# Altium PCB sineytin.PCBDOC
Units mil, origin at the board's own origin, x right, y up, seen from the top; angles counter-clockwise.
Board outline 5995 x 3285 mil, 2 copper layers (TopLayer, BottomLayer); 24 components, 39 nets, 146 pads, 43 vias.
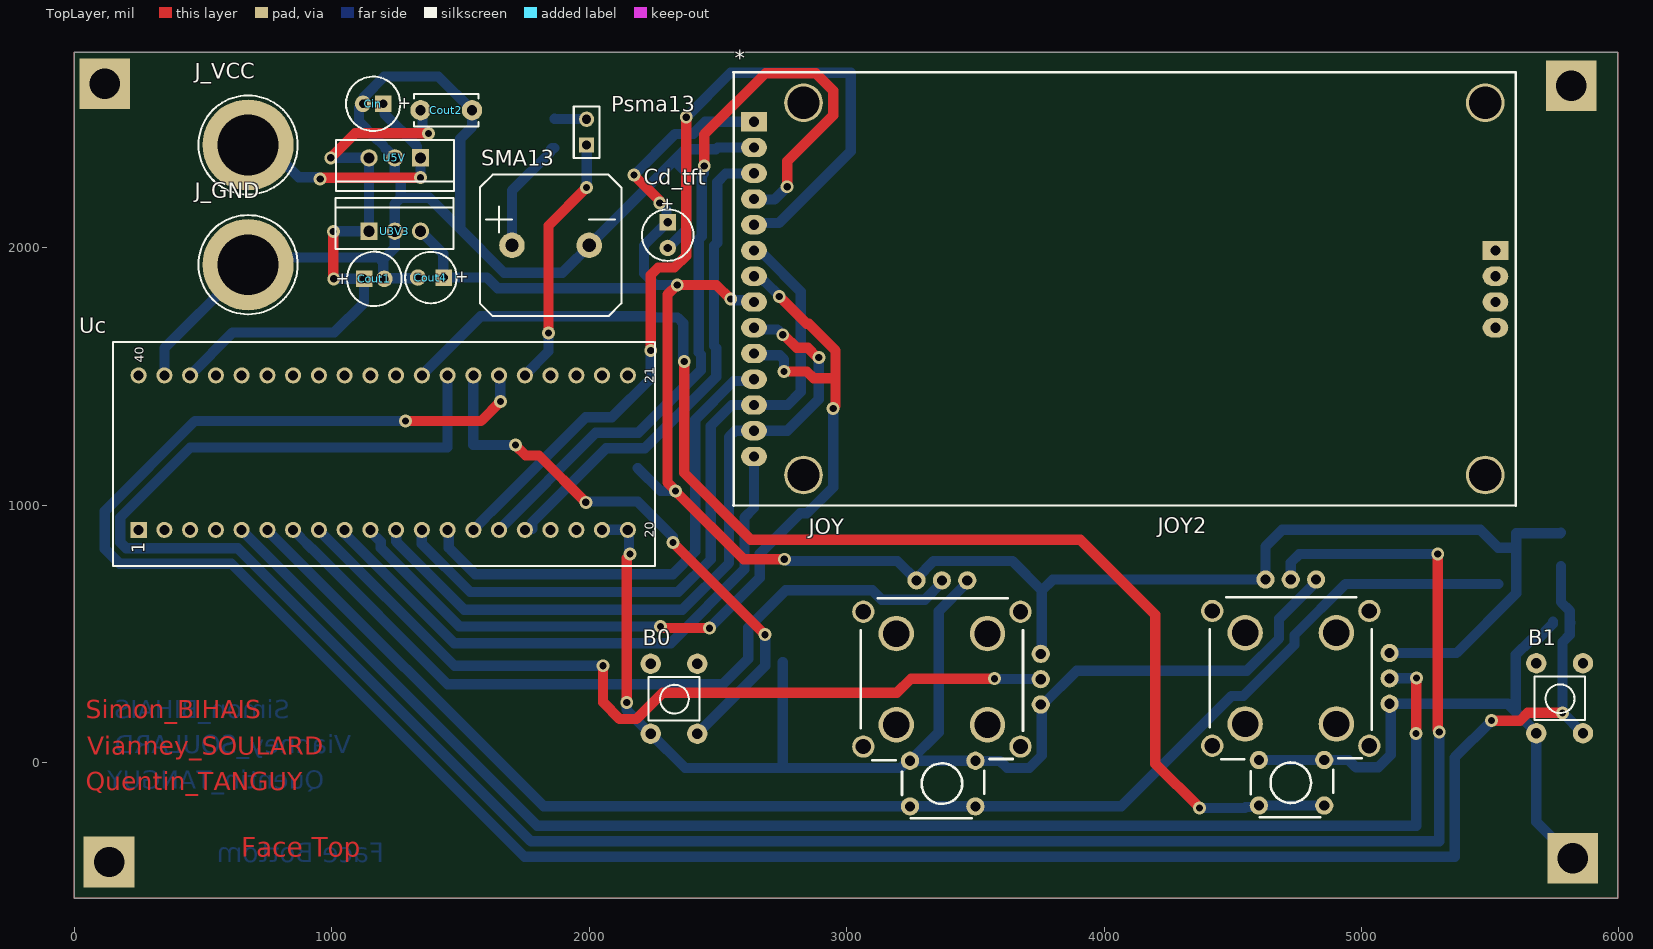
[diagram p0: TopLayer view]
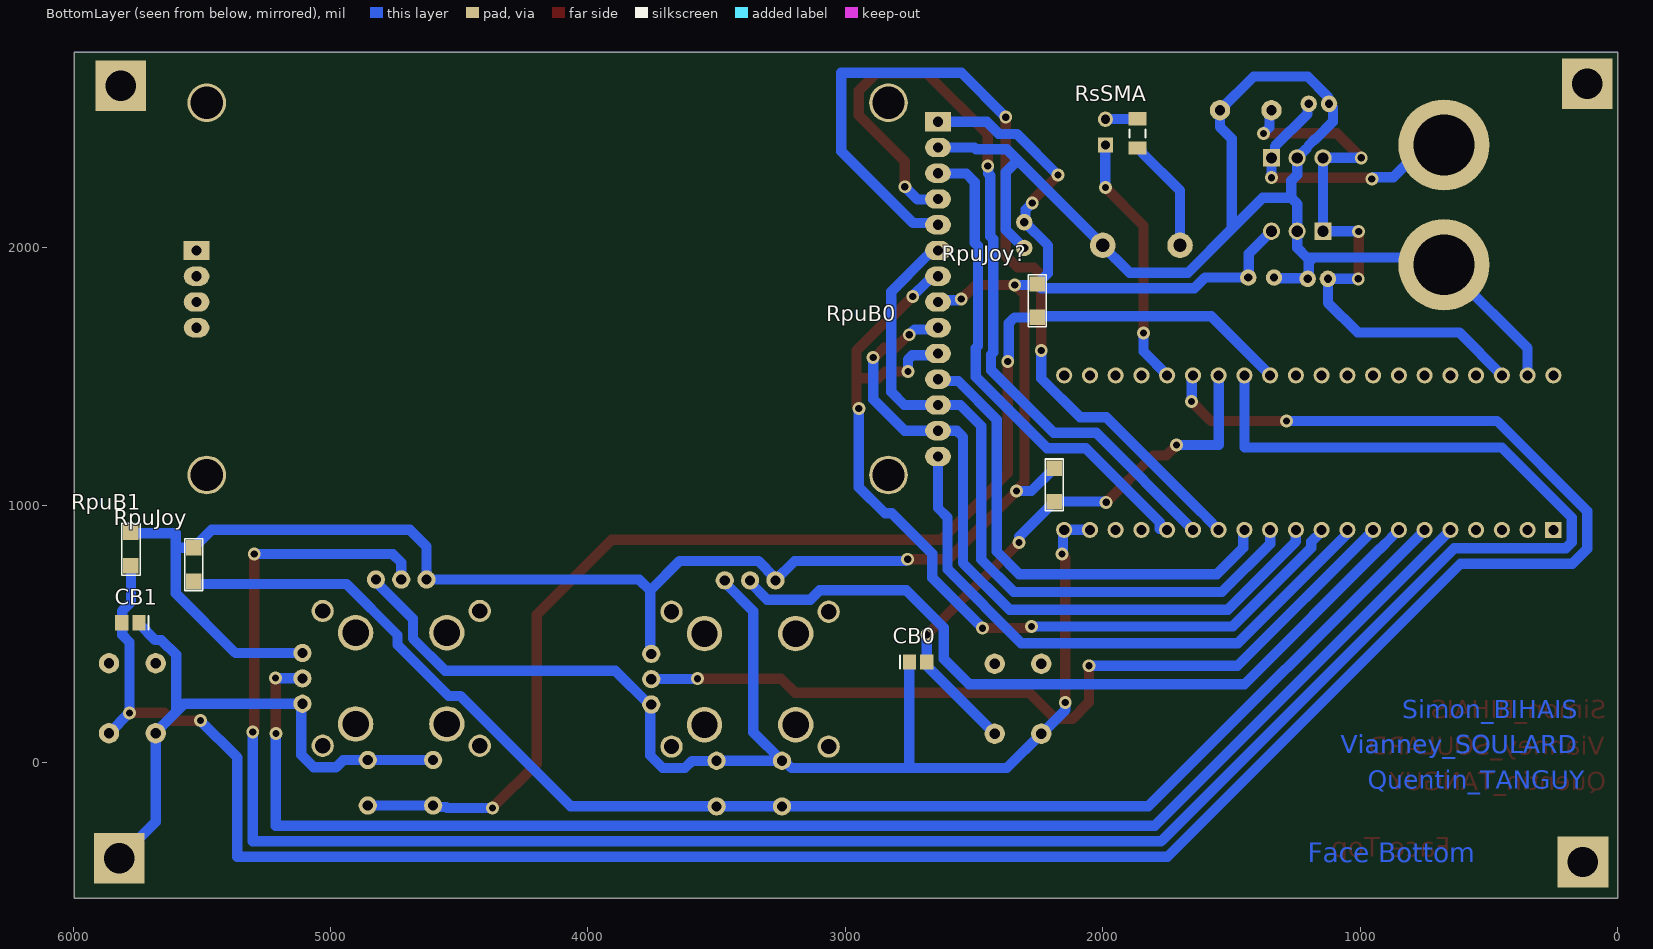
[diagram p1: BottomLayer view, seen from below]

## Layer stack, top to bottom
TopSolder: solder mask 0.4, Solder Resist, Dk 3.5
TopLayer: signal copper 1.4
Dielectric1: core 12.6, FR-4, Dk 4.8
BottomLayer: signal copper 1.4
BottomSolder: solder mask 0.4, Solder Resist, Dk 3.5

## Board outline
0,-525 0,2760 5995,2760 5995,-525

## Design rules (kind name [scope] priority, off if disabled: settings)
Clearance Clearance_3 [InNamedPolygon('Bot-GND') Or  InNamedPolygon('Top-GND')] p1: gap=10 ignorepadtopadclearanceinfootprint=FALSE except(0: Arc-Hole Track-Hole SMDPad-Hole THPad-Hole Via-Hole Fill-Hole Poly-Hole Region-Hole Text-Hole)
Clearance Clearance_2 [InNamedPolygon('Bot-GND') Or  InNamedPolygon('Top-GND')] p2: gap=40 ignorepadtopadclearanceinfootprint=FALSE
Clearance Clearance_1 [InNamedPolygon('Bot-GND') Or  InNamedPolygon('Top-GND')] p3: gap=10 ignorepadtopadclearanceinfootprint=FALSE except(0: Arc-Hole Track-Hole SMDPad-Hole THPad-Hole Via-Hole Fill-Hole Poly-Hole Region-Hole Text-Hole)
Clearance PowerPlaneClearance [InNamedPolygon('Bot-GND') Or  InNamedPolygon('Top-GND')] p4: gap=40 ignorepadtopadclearanceinfootprint=FALSE except(0: Arc-Hole Track-Hole SMDPad-Hole THPad-Hole Via-Hole Fill-Hole Poly-Hole Region-Hole Text-Hole)
Clearance [All] p5: gap=20 ignorepadtopadclearanceinfootprint=TRUE except(0: Arc-Hole Track-Hole SMDPad-Hole THPad-Hole Via-Hole Fill-Hole Poly-Hole Region-Hole Text-Hole)
FabricationTestPointUsage TestPointUsage [All] p1: valid=0 allowmultiple=FALSE
FabricationTestpoint Testpoint [All] p1: side=3 testpointundercomponent=TRUE minsize=40 maxsize=100 preferedsize=60 minholesize=20 maxholesize=40 preferedholesize=32 testpointgrid=1 allowsidetop=TRUE allowsidebottom=TRUE usegrid=TRUE gridtolerance=0.01
Height [All] p1: minheight=0 maxheight=2000 prefheight=500
HoleSize [All] p1: absolutevalues=TRUE maxlimit=300 minlimit=11.81 maxpercent=80.000 minpercent=20.000
PlaneClearance [All] p1: clearance=40
PlaneConnect [All] p1: planeconnectstyle=Relief reliefexpansion=19.68 reliefentries=4 reliefconductorwidth=40 reliefairgap=19.68
PolygonConnect [All] p1: connectstyle=Relief reliefconductorwidth=40 reliefentries=4 polygonreliefangle="90 Angle" airgapwidth=10
RoomDefinition projet_pcb_bluepill_f103 [InComponentClass('projet_pcb_bluepill_f103')] p1: confinementstyle=ConfineIn formatcopy=TRUE lockcomponents=FALSE outline 3080,-1830 5265,-1830 5265,-2490 3080,-2490
RoutingVias [All] p1: holewidth=23.62 width=60 viastyle="Through Hole" minholewidth=23.62 minwidth=60 maxholewidth=23.62 maxwidth=60
SilkToSolderMaskClearance SilkscreenOverComponentPads [IsPad] p1: minsilkscreentomaskgap=10 clearancetoexposedcopper=TRUE
SolderMaskExpansion [All] p1: expansion=2
Width [All] p1: maxlimit=1000 minlimit=12 preferedwidth=40
23 further rules are at their usual default settings.

## Classes and differential pairs
component class projet_pcb_bluepill_f103: B0 B1 CB0 CB1 Cd_tft Cin Cout1 Cout2 Cout4 J_GND J_VCC JOY2 Psma13 RpuB0 RpuB1 RpuJoy RpuJoy? RsSMA SMA13 U3V3 U5V

## Components (designator, comment, footprint, x,y, rotation, side; value= is the part's Value field where it differs from the comment)
* "2.4_TFT_TOUCH" 2.4_TFT_TOUCH 2560.16,1000 r0 top
B0 "BOUTON_POUSSOIR_MINIATURE_TRAVERSANT" BOUTON_POUSSE_PLAT_6x6 2231.02,97.6 r0 top
B1 "BOUTON_POUSSOIR_MINIATURE_TRAVERSANT" BOUTON_POUSSE_PLAT_6x6 5671.02,99.25 r0 top
CB0 "Condensateur 0805" C0805_N 2717.53,392 r180 bottom value=100nF
CB1 "Condensateur 0805" C0805_N 5777,544 r0 bottom value=100nF
Cd_tft "10uF" CONDENSATEUR_POLARISE_ELECTROLYTIQUE_RADIAL_2.54/5.08 2305,2100 r270 top
Cin "CONDENSATEUR_POL_ELECTROLY_RAD_2.0/5.08" CONDENSATEUR_POLARISE_ELECTROLYTIQUE_RADIAL_2.0/5.08 1160.63,2560 r180 top value=10µF/>25V
Cout1 "CONDENSATEUR_POL_ELECTROLY_RAD_2.0/5.08" CONDENSATEUR_POLARISE_ELECTROLYTIQUE_RADIAL_2.0/5.08 1165,1880 r0 top value=1µF/>10V
Cout2 "CONDENSATEUR_CER_RAD_5.08" CONDENSATEUR_CERAMIQUE_RADIAL_5.08 1545,2535 r180 top value=100nF
Cout4 "CONDENSATEUR_POL_ELECTROLY_RAD_2.54/5.08" CONDENSATEUR_POLARISE_ELECTROLYTIQUE_RADIAL_2.54/5.08 1435,1885 r180 top value=4.7µF/63V
J_GND "DOUILLE BANANE 4mm" DOUILLE_BANANE_4mm 675,1935 r0 top
J_VCC "DOUILLE BANANE 4mm" DOUILLE_BANANE_4mm 675,2400 r0 top
JOY "JOYSTICK_MINI_AVEC_SWITCH" "JOYSTICK_MINI - avec Switch" 3370,325 r0 top
JOY2 "JOYSTICK_MINI_AVEC_SWITCH" "JOYSTICK_MINI - avec Switch" 4725.12,328.19 r0 top
Psma13 "Jumper SIP 2.54" HDR1X2 1990,2400 r90 top
RpuB0 "RESISTANCE_CMS_1206" RESISTANCE_CMS_1206 2189,1014.99 r90 bottom value=10k
RpuB1 "RESISTANCE_CMS_1206" RESISTANCE_CMS_1206 5775,765 r90 bottom value=10k
RpuJoy "RESISTANCE_CMS_1206" RESISTANCE_CMS_1206 5531,705 r90 bottom value=10k
RpuJoy? "RESISTANCE_CMS_1206" RESISTANCE_CMS_1206 2255,1730 r90 bottom value=10k
RsSMA "220" R1206_N 1865,2445 r90 bottom
SMA13 "BUZZER_SMA13" BUZZER_SMA13 1700,2010 r0 top value=SMA13
U3V3 "REGULATEUR_TO220_78XX" REGULATEUR_TO220_78XX 1245,2065 r0 top
U5V "REGULATEUR_TO220_78XX" REGULATEUR_TO220_78XX 1245,2350 r180 top
Uc "STM32F103C8T6/PCB_DIP40" STM32F103C8T6_DIP40 250,905 r90 top

## Footprints (in the part's own frame and the unit in brackets; to place one, negate y for a bottom-side part, rotate by r counter-clockwise, add the part's x,y. Pads: shape width x height; smd on the part's side, far side on the other; paste and mask are expansions set on the pad)
2.4_TFT_TOUCH [mil]
  round 150 hole 125: 0(272.44,118.11) 0(272.44,1563.78) 0(2920.47,118.11) 0(2920.47,1563.78)
  rect 100x75 hole 40: 1(80,1490) 18(2959.84,990)
  oval 100x75 hole 40: 2(80,1390) 3(80,1290) 4(80,1190) 5(80,1090) 6(80,990) 7(80,890) 8(80,790) 9(80,690) 10(80,590) 11(80,490) 12(80,390) 13(80,290) 14(80,190) 15(2959.84,690) 16(2959.84,790) 17(2959.84,890)
  silkscreen extent 0,-1 3039,1682, body extent 0,-1 3039,1681, height 650
BOUTON_POUSSE_PLAT_6x6 [mil] "BOUTON POUSSOIR MINIATURE ON/OFF; BOUTON PLAT/LONG ; ESPACEMENT BROCHES = 7.62mm/5.08mm"
  round 79 hole 40: 1(7.87,15.75) 2(188.98,15.75) 3(188.98,287.4) 4(7.87,287.4)
  silkscreen extent 0,67 197,236, body extent -22,-1 222,310, height 276
BUZZER_SMA13 [mil] "BUZZER SMA13 ; DIMENSIONS :13.96mm x 13.96mm ; ESPACEMENT BROCHES : 7.62mm"
  round 99 hole 52: 1(0,0) 2(300,0)
  silkscreen extent -125,-275 425,275, body extent -126,-276 425,276, height 256
C0805_N [mm] "Chip Capacitor, Body 2.0x1.3mm, IPC Medium Density"
  rect 1.3x1.5 smd: 1(-0.85,0) 2(0.85,0)
  silkscreen extent -1.8,-0.65 -1.8,0.65, body extent -0.99,-0.63 1.01,0.62, height 0.8
CONDENSATEUR_CERAMIQUE_RADIAL_5.08 [mil] "CONDENSATEUR TRAVERSANT CERAMIQUE RADIAL ; DIMENSIONS : 3.17mm x 5.08mm"
  round 79 hole 40: 1(0,0) 2(200,0)
  silkscreen extent -25,-62 225,63, body extent -11,-43 209,42, height 148
CONDENSATEUR_POLARISE_ELECTROLYTIQUE_RADIAL_2.0/5.08 [mil] "CONDENSATEUR POLARISE ELECTROLYTIQUE RADIAL ; DIAMETRE : 5.08mm ; ESPACEMENT BROCHES : 2mm"
  rect 64x64 / inner round 64 / far side round 64 hole 32: 1(-39.37,0)
  round 64 hole 32: 2(39.37,0)
  silkscreen extent -106,-106 105,106, body extent -98,-98 98,98, height 433
CONDENSATEUR_POLARISE_ELECTROLYTIQUE_RADIAL_2.54/5.08 [mil] "CONDENSATEUR_POLARISE_ELECTROLYTIQUE_RADIAL ; DIAMETRE : 5.08mm ; ESPACEMENT BROCHES : 2.54mm"
  rect 64x64 / inner round 64 / far side round 64 hole 32: 1(0,0)
  round 64 hole 32: 2(100,0)
  silkscreen extent -50,-100 150,100, body extent -50,-101 149,98, height 446
DOUILLE_BANANE_4mm [mm] "DOUILLE BANANE ; DIAMETRE PASSAGE CONTACT = 4 mm ; DIAMETRE PERCAGE = 6 mm"
  round 9 hole 6: 1(0,0)
  silkscreen extent -4.89,-4.89 4.89,4.89, body extent -5.5,-5.6 5.63,5.53, height 4.79
HDR1X2 [mm] "Connector; Header; 2 Position"
  rect 1.5x1.5 hole 0.9: 1(0,0)
  round 1.5 hole 0.9: 2(2.54,0)
  silkscreen extent -1.27,-1.27 3.81,1.27
"JOYSTICK_MINI - avec Switch" [mm] "JOYSTICK POTENTIOMETRIQUE MINIATURE - RKJXK122000D - 22.7mmx20.7mm"
  round 1.8 hole 1: 1(-2.5,9.75) 2(0,9.75) 3(2.5,9.75) 4(9.75,2.5) 5(9.75,0) 6(9.75,-2.5) 7(-3.15,-8.05) 7(3.3,-8.05) 8(-3.15,-12.55) 8(3.3,-12.55)
  round 2.2 hole 1.5: -(-7.75,-6.65) -(-7.75,6.65) -(7.75,-6.65) -(7.75,6.65)
  round 3.5 hole 2.6: -(-4.5,-4.5) -(-4.5,4.5) -(4.5,-4.5) -(4.5,4.5)
  silkscreen extent -8,-13.72 8,8, body extent -13.39,-14.61 13.61,13.56, height 30.16
R1206_N [mm] "Chip Resistor, Body 3.2x1.6mm, IPC Medium Density"
  rect 1.3x1.8 smd: 1(-1.45,0) 2(1.45,0)
  silkscreen extent -0.4,-0.8 0.4,0.8, body extent -1.68,-0.87 1.68,0.87, height 0.71
REGULATEUR_TO220_78XX [mm] "BOITIER TO220 ; DIMENSIONS : 11.2mm x 4.7mm ; ESPACEMENT BROCHES : 2.54 mm"
  rect 1.7x1.7 hole 1.1: 1(-2.54,0)
  round 1.7 hole 1.1: 2(0,0) 3(2.54,0)
  silkscreen extent -5.83,-1.77 5.8,3.29, body extent -5.61,-1.59 5.61,3.1, height 19.33
RESISTANCE_CMS_1206 [mil] "RESISTANCE CMS 1206 ; DIMENSIONS : 3.2mm x 1.6mm"
  rect 60x60 smd: 1(0,0) 2(130,0)
  silkscreen extent -35,-35 165,35, body extent 0,-31 126,31, height 39
STM32F103C8T6_DIP40 [mm] "STM32F103 monté sur DIP40"
  rect 1.6x1.6 hole 1: 1(0,0)
  round 1.6 hole 1: 2(0,-2.54) 3(0,-5.08) 4(0,-7.62) 5(0,-10.16) 6(0,-12.7) 7(0,-15.24) 8(0,-17.78) 9(0,-20.32) 10(0,-22.86) 11(0,-25.4) 12(0,-27.94) 13(0,-30.48) 14(0,-33.02) 15(0,-35.56) 16(0,-38.1) 17(0,-40.64) 18(0,-43.18) 19(0,-45.72) 20(0,-48.26) 21(15.24,-48.26) 22(15.24,-45.72) 23(15.24,-43.18) 24(15.24,-40.64) 25(15.24,-38.1) 26(15.24,-35.56) 27(15.24,-33.02) 28(15.24,-30.48) 29(15.24,-27.94) 30(15.24,-25.4) 31(15.24,-22.86) 32(15.24,-20.32) 33(15.24,-17.78) 34(15.24,-15.24) 35(15.24,-12.7) 36(15.24,-10.16) 37(15.24,-7.62) 38(15.24,-5.08) 39(15.24,-2.54) 40(15.24,0)
  silkscreen extent -3.56,-50.92 18.54,2.54, body extent -3.63,-51.04 18.37,6.1, height 20.63

## Part data
B0 B1: "BOUTON POUSSOIR MINIATURE TRAVERSANT ON/OFF", Type=B_POUSS_MINI_T
CB0 CB1: library part CONDENSATEUR_CER_RAD_5.08, Type=RADIAL_5.08
Cd_tft: library part Condensateur, "Capacitor", LatestRevisionDate=17-Jul-2002, LatestRevisionNote="Re-released for DXP Platform.", PackageReference=RAD-0.3, Published=8-Jun-2000, Publisher="Altium Limited"
Cin Cout1: "CONDENSATEUR POLARISE ELECTROLYTIQUE RADIAL 2.0/5.08", Type=POL_RAD_2.0/5.08
Cout2: "CONDENSATEUR TRAVERSANT CERAMIQUE RADIAL 5.08mm", Type=RADIAL_5.08
Cout4: "CONDENSATEUR POLARISE ELECTROLYTIQUE RADIAL 2.54/5.08", Type=POL_RAD_2.54/5.08
J_GND J_VCC: library part DOUILLE_BANANE_4mm, "DOUILLE BANANE 4 mm", Type=BANANE_4mm
JOY JOY2: "JOYSTICK POTENTIOMETRIQUE MINIATURE RKJXK122000D", Type=JOYSTICK
Psma13: library part "Jumper SIP2.54", "Jumper SIP2.54"
RpuB0 RpuB1 RpuJoy RpuJoy?: "RESISTANCE CMS 1206", Type=CMS_1206
RsSMA: library part Resistor, "Resistor", LatestRevisionDate=17-Jul-2002, LatestRevisionNote="Re-released for DXP Platform.", PackageReference=AXIAL-0.5, Published=8-Jun-2000, Publisher="Altium Limited"
SMA13: "BUZZER SMA13", Type=BUZZER
U3V3 U5V: "REGULATEUR DE TENSION POSITIVE 78XX BOITIER TO220", Package=(TO220)
  U3V3: Type=LF33CV
  U5V: Type=7805
Uc: "MICROCONTROLEUR 32 BITS - 72MHz - 34 I/O - 64 KO : FLASH - 20KO RAM - 10 CANAUX A/D 12 BITS - DIP40 - UART, SPI, I2C, USB, CAN", Package=DIP40, Type=STM32F103C8T6

## Free pads (board coordinates)
  rect 196.85x196.85 hole 118.11: 1(118.11,2637.8) 2(135,-385) 3(5820,-370) 4(5815,2630)

## Via types
v1: diameter 50, hole 28, TopLayer to BottomLayer, 43 vias

## Nets (pads, with @x,y where several pads share a name; then routed paths per layer and width w, separated by ;. In a path a pad name is that pad's centre, name@x,y a point inside that pad or via, vN(x,y) a via of type N, cw(c..) or ccw(c..) an arc to the next point about the centre after c; other vN are vias at no path point)
+3V3: *.1 *.8 Cd_tft.1 Cout4.1 JOY2.1 JOY2.4 JOY.1 JOY.4 RpuB0.2 RpuB1.2 RpuJoy.2 RpuJoy?.2 U3V3.3 | length 8504.5
  TopLayer w40: v1(2174,2283) 2272.09,2184.91 2272.09,2176.91 v1(2274,2175) ; v1(2550,1802) 2548,1802 2494,1856 v1(2342,1856) 2304,1818 2304,1089.71 2335,1058.71 v1(2335,1056) 2600,791 v1(2758,791)
  BottomLayer w40: U3V3.3 1433,1977 1433,1887 Cout4.1 1603.22,1885 1644.22,1844 2239,1844 RpuJoy?.2 ; v1(2174,2283) 2334,2443 2403.92,2443 2450.92,2490 *.1 ; RpuB0.2 2277.99,1056 v1(2335,1056) ; v1(2274,2175) 2300.41,2148.59 2300.41,2104.59 Cd_tft.1 2303.18,2100 2213,2009.82 2213,1902 RpuJoy?.2 ; v1(2342,1856) 2259,1856 RpuJoy?.2 ; v1@2557,1802 2562.3,1796.7 2633.46,1796.7 *.8 ; v1(2758,791) 2765,784 3196.43,784 JOY.1 3271.57,717.11 3338.75,784.29 3643.71,784.29 3758.43,669.57 ; JOY.4 3758.43,427.99 3758.43,669.57 ; JOY2.4 5369.18,426.61 5601,658.43 5601,835 ; RpuB1.2 5771.57,891.57 5601,891.57 5601,835 ; 3758.43,669.57 3800.9,712.05 JOY2.1 4626.69,839.69 4692,905 5461,905 RpuJoy.2 5601,835
+3V3_BP: Uc.40
+3V3_BP2: Uc.18
+5V: Cout1.1 Cout2.2 U3V3.1 U5V.3 Uc.38 | length 2286.5
  TopLayer w40: v1(996,2350) 1091,2445 v1(1376,2445) ; v1(1006.09,2064) 1006.09,1881.91 v1(1008,1880)
  BottomLayer w40: Uc.38 450,1506.11 615.89,1672 1010,1672 1125.63,1787.63 Cout1.1 v1(1008,1880) v1@1007,1879 ; v1@995,2349 v1(996,2350) U5V.3 U3V3.1 1007.09,2065 v1(1006.09,2064) ; Cout2.2 1352.46,2527.54 1352.46,2468.54 v1(1376,2445)
GND: *.2 B0.1 B1.1 CB0.1 CB1.1 Cd_tft.2 Cin.2 Cout1.2 Cout2.1 Cout4.2 J_GND.1 JOY2.3 JOY2.6 JOY2.7 JOY.3 JOY.6 JOY.7 pad.3 pad.4 SMA13.2 U3V3.2 U5V.2 Uc.19 Uc.20 Uc.39 | length 12663.2
  TopLayer w40: v1(2146,235) 2146,795.29 2159,808.29 v1(2159,811)
  BottomLayer w40: Uc.39 350,1610 J_GND.1@629.04,1889.04 ; J_GND.1 703,1963 1199.78,1963 1208,1963 1245,2000 U3V3.2 1245,2171.1 1268.43,2194.53 ; 1194.47,1949.47 1199.78,1944.16 1199.78,1884.59 Cout1.2 1206.87,1882.5 1332.5,1882.5 Cout4.2 ; 1199.08,2399.82 1175.43,2423.46 1172,2423.46 1106,2489.46 1106,2544.74 Cin.2 1125.85,2564.59 1125.85,2587.68 1204.18,2666 1414,2666 Cout2.1 1545,2470 1499.04,2424.04 1499.04,2074.04 ; 1209.09,2385.91 U5V.2 1245,2289.41 ; 1245,2284.41 1268.43,2260.98 1268.43,2194.53 ; 1952,1959 1951,1958 1950,1958 1896,1904 1669.08,1904 1499.04,2074.04 ; 1955.05,1963.05 2000,2008 SMA13.2 2330.5,2340.5 ; Uc.19 Uc.20 2154.4,900.6 2154.4,818.31 2159,813.71 v1(2159,811) ; v1(2146,235) 2146,205.12 2237.78,113.35 B0.1 2372.36,-20.12 2749.88,-20.12 ; Cd_tft.2 2306.82,2000 2377,2070.18 2377,2294 2330.5,2340.5 ; *.2 2499.09,2390 2492.09,2383 2373,2383 2330.5,2340.5 ; CB0.1 2752,391 2752,-18 2749.88,-20.12 ; JOY.3 3468.43,700.61 3357.2,589.38 3357.2,119.29 JOY.7@3245.98,8.07 ; JOY2.7@4601.1,11.26 4855.04,11.26 4855.54,10.76 4950.47,10.76 4978.16,-16.93 5064.74,-16.93 5113.54,31.87 5113.54,225.2 JOY2.6 5568.24,229.76 5599.4,198.6 ; JOY2.3 4823.54,703.8 4679.65,559.9 4679.65,483.05 4554.37,357.76 3893.3,357.76 3762.11,226.57 JOY.6 3758.43,222.01 3758.43,28.68 3709.62,-20.12 3623.04,-20.12 3595.36,7.57 3500.42,7.57 3499.92,8.07 JOY.7@3245.98,8.07 ; CB1.1@5743.53,547.94 CB1.1 5743.53,540.06 5680.5,477.03 5656.84,477.03 5599.4,419.58 5599.4,198.6 ; pad.3@5774.04,-415.96 5774.04,-324.04 5678.9,-228.9 B1.1 5678.9,119.1 5599.4,198.6 ; 1268.43,2194.53 1378.55,2194.53 1499.04,2074.04 ; 2749.88,-20.12 3209.44,-20.12 3237.63,8.07 JOY.7@3245.98,8.07
"JOY2_y         PA0_AN0": JOY2.5 Uc.5 | length 5719.9
  TopLayer w40: v1(5212,114) 5213,115 5213,329 v1(5214,330)
  BottomLayer w40: Uc.5 650,903.89 1798.42,-244.53 5212,-244.53 v1(5212,114) ; JOY2.5 5212.19,328.19 v1(5214,330)
"JOY_b           PA1_AN1": JOY.8 RpuJoy.1 Uc.6 | length 5607
  BottomLayer w40: Uc.6 750,903.89 1822.98,-169.09 3245.98,-169.09 3499.92,-169.09 4066.71,-169.09 4495.73,259.92 4541.38,259.92 4739.65,458.2 4739.65,496.73 4937.93,695 RpuJoy.1@5531,695
"JOY_x        PA2_U2TX": JOY.2 Uc.7 | length 3042.1
  BottomLayer w40: Uc.7 878.5,876.5 878.5,875.39 920.39,833.5 921.5,833.5 1449.5,305.5 2519.5,305.5 2618,404 2618,524.92 2763.2,670.12 3099.39,670.12 3136.08,633.42 3302.82,633.42 3370,700.61 JOY.2
"JOY_y        PA3_U2TX": JOY.5 Uc.8 | length 3258
  TopLayer w40: v1(2054,377) 2054,235.08 2119.08,170 2183.12,170 2285.12,272 3195,272 3250,327 v1(3574,327)
  BottomLayer w40: Uc.8 950,903.89 1476.89,377 v1(2054,377) ; v1(3574,327) 3575,326 3752.86,326 JOY.5
NetPsma13_2: Psma13.2 RsSMA.2 | length 125.9
  BottomLayer w40: RsSMA.2 1866.04,2501.04 1988.96,2501.04 Psma13.2
NetRsSMA_1: RsSMA.1 SMA13.1 | length 452
  BottomLayer w40: SMA13.1 1700,2222.91 1849.57,2372.48 1849.57,2382.32 1855.16,2387.91 RsSMA.1
PA4_TOUCH-IRQ: *.14 Uc.9 | length 2317.3
  BottomLayer w40: Uc.9 1050,889.85 1475.35,464.5 2316.28,464.5 2603,751.22 2603,952.68 2640.16,989.84 *.14
PA5_TFT-SCK: *.7 *.10 Uc.10 | length 3611.5
  TopLayer w40: v1(2277,530) 2283.18,523.82 2466.18,523.82 v1(2466.85,523.15) ; v1(2738,1812) 2844.49,1705.51 2852.42,1705.51 2957,1600.92 2957,1493.35 ; v1(2757,1520.08) 2844.99,1520.08 2871.72,1493.35 2957,1493.35 ; v1(2947.6,1376.38) 2957,1385.78 2957,1493.35
  BottomLayer w40: Uc.10 1150,898.78 1190,858.78 1190,834.71 1494.71,530 v1(2277,530) ; v1(2466.85,523.15) 2663,719.29 2663,813 2819,969 2846.12,969 2947.6,1070.48 v1(2947.6,1376.38) ; *.10 2646.85,1583.3 2740.27,1583.3 2757,1566.57 v1(2757,1520.08) ; *.7 2662.13,1890 2684.63,1867.5 2684.76,1867.5 2738,1814.26 v1(2738,1812)
PA6_TFT-MISO: *.9 *.13 Uc.11 | length 2883.9
  TopLayer w40: v1(2752,1663) 2754.71,1663 2805.71,1612 2848.92,1612 2886.92,1574 v1(2892,1574)
  BottomLayer w40: Uc.11 1250,859.56 1514.56,595 2361.93,595 2543,776.07 2543,1266 2567,1290 *.13 2769.3,1290 2892,1412.7 v1(2892,1574) ; *.9 2646.85,1683.3 2731.7,1683.3 v1(2752,1663)
PA7_TFT-MOSI: *.6 *.12 Uc.12 | length 2856.6
  BottomLayer w40: Uc.12 1350,851 1537.09,663.91 2345.99,663.91 2472,789.92 2472,1308.57 2553.43,1390 *.12 ; *.6 2662.13,1990 2684.63,1967.5 2684.76,1967.5 2822,1830.26 2822,1441 2771,1390 *.12@2650,1390
"PA8      BUZZER": Psma13.1 Uc.25 | length 994.4
  TopLayer w40: v1(1842,1670) 1842,2087 v1(1990,2235)
  BottomLayer w40: Uc.25 1750,1506.11 1842,1598.11 v1(1842,1670) ; v1(1990,2235) Psma13.1
"PA9      B1": B1.2 CB1.2 RpuB1.1 Uc.26 | length 9292.1
  TopLayer w40: v1(1287,1328) 1580,1328 v1(1656,1404) ; v1(5505,164) 5615.47,164 5645.97,194.5 5780.5,194.5 v1(5780.79,194.21)
  BottomLayer w40: v1(1287,1328) 468.59,1328 118.5,977.92 118.5,832.08 177.08,773.5 610.68,773.5 1748.71,-364.53 5362,-364.53 5362,21 v1(5505,164) ; Uc.26@1647.8,1502.8 Uc.26 1654.09,1500.91 1654.09,1405.91 v1(1656,1404) ; RpuB1.1 5774.7,764.7 5774.7,624.52 5809.13,590.1 5809.13,545.34 CB1.2 5809.13,542.66 5809.13,497.9 5780.5,469.28 5780.5,194.5 v1(5780.79,194.21) B1.2
"PA10    B0": B0.2 CB0.2 RpuB0.1 Uc.27 | length 2219
  TopLayer w40: v1(1713.43,1234.43) 1754,1193.85 1805.15,1193.85 v1(1987,1012) ; v1(2325,856) v1(2683,498)
  BottomLayer w40: Uc.27 1550,1234.43 v1(1713.43,1234.43) ; v1(1987,1012) 1989.99,1014.99 RpuB0.1 2325,878.99 v1(2325,856) ; B0.2 2684.07,377.42 CB0.2 2683.53,392.53 2683.53,497.47 v1(2683,498)
"PA11    JOY2_x": JOY2.2 Uc.28 | length 9133.6
  TopLayer w40: v1(5296,811) 5296,128.71 5302,122.71 v1(5302,120)
  BottomLayer w40: Uc.28 1450,1225 450.44,1225 178.5,953.06 178.5,856.94 201.94,833.5 635.53,833.5 1773.56,-304.53 5302,-304.53 v1(5302,120) ; JOY2.2 4725.12,778.33 4757.78,811 v1(5296,811)
"PA12    JOY2_b": JOY2.8 RpuJoy?.1 Uc.29 | length 5073.8
  TopLayer w40: v1(2369,1559) 2369,1125.92 2627.97,866.95 3908.05,866.95 4199,576 4199,-3 v1(4371,-175)
  BottomLayer w40: Uc.29 1350,1506.11 1578.89,1735 2250,1735 RpuJoy?.1 2343.28,1730 2365,1708.28 2365,1563 v1(2369,1559) ; v1(4371,-175) 4546,-175 4549.19,-171.81 4595.2,-171.81 4601.1,-165.91 JOY2.8@4855.04,-165.91
PA15: Uc.30
PB0_TOUCH-CS: *.11 Uc.13 | length 1891.3
  BottomLayer w40: Uc.13@1454.4,900.6 1454.4,835.6 1454.82,835.18 ; 1465.96,824.04 1557,733 2324.09,733 2412,820.91 2412,1333.42 2561.88,1483.3 2633.46,1483.3 *.11
PB1_TFT-DC: *.5 Uc.14 | length 3550.9
  TopLayer w40: v1(2239,1602) 2239,1895 2268,1924 2331,1924 2377,1970 v1(2377,2508)
  BottomLayer w40: Uc.14 1578.5,933.5 1578.5,934.61 1620.39,976.5 1621.5,976.5 1987,1342 2088.11,1342 2239,1492.89 v1(2239,1602) ; v1(2377,2508) 2549,2680 3016,2680 3016,2376 2736.7,2096.7 2646.85,2096.7 *.5
PB3: Uc.31
PB4: Uc.32
PB5: Uc.33
PB6_U1TX: Uc.34
PB7_U1RX: Uc.35
PB8_I2C_SCL: Uc.36
PB9_I2C_SDA: Uc.37
PB10_TFT-RESET: *.4 Uc.15 | length 3197.7
  TopLayer w40: v1(2447,2318) 2447,2440.91 2684.87,2678.78 2880.23,2678.78 2947.6,2611.41 2947.6,2515.36 2769,2336.76 v1(2769,2238)
  BottomLayer w40: Uc.15 1650,906.11 2025.89,1282 2190.87,1282 2434,1525.13 2434,1585.92 2425,1594.92 2425,2033.32 2437,2045.32 2437,2280.85 2445.09,2288.94 2445.09,2316.09 v1(2447,2318) ; *.4@2640.16,2196.7 2648.85,2188 2719,2188 v1(2769,2238)
PB11_TFT-CS: *.3 Uc.16 | length 1927.2
  BottomLayer w40: Uc.16 1754.09,909.09 1778.5,909.09 1778.5,934.61 2065.89,1222 2215.73,1222 2494,1500.27 2494,1610.78 2485,1619.78 2485,2008.47 2497,2020.47 2497,2256 2530.16,2289.16 2639.32,2289.16 *.3
PB12: Uc.21
PB13: Uc.22
PB14: Uc.23
PB15: Uc.24
PC14_OSC32: Uc.3
PC15_OSC32: Uc.4
VCC: Cin.1 J_VCC.1 U5V.1 | length 1073.8
  TopLayer w40: v1(955,2268) 957.71,2268 962.71,2273 v1(1345,2273)
  BottomLayer w40: J_VCC.1 746.4,2400 871.4,2275 948,2275 v1(955,2268) ; Cin.1 1204.59,2555.41 1204.59,2521.41 1331.54,2394.46 1331.54,2363.46 U5V.1 v1(1345,2273)
pads on no net: *.0 *.15 *.16 *.17 *.18 B0.3 B0.4 B1.3 B1.4 JOY2.- JOY.- Uc.1 Uc.2 Uc.17
copper on no net: | length 18.3
  TopLayer w50: 2828.8,1114.31 2828.8,1121.91
  BottomLayer w50: 2825,1125.71 2832.6,1118.11

## Polygon pours and split planes (outlines as drawn)
GND on BottomLayer "Bot-GND" (solid, shelved, pour order 5): 0,2760 5995,2760 5995,-525 0,-525
GND on TopLayer "Top-GND" (solid, shelved, pour order 4): 0,2760 5995,2760 5995,-525 0,-525

## Other copper
TopLayer:
  text "Simon_BIHAIS" at 45,174 h70.87
  text "Vianney_SOULARD" at 50,31 h70.87
  text "Quentin_TANGUY" at 44,-106 h70.87
  text "Face Top" at 648,-364 h75
BottomLayer:
  text "Simon_BIHAIS" at 836,173 h70.87
  text "Vianney_SOULARD" at 1076,38 h70.87
  text "Vianney_SOULARD" at 1076,38 h70.87
  text "Quentin_TANGUY" at 971,-101 h70.87
  text "Face Bottom" at 1204,-387 h75

## Silkscreen, mask and mechanical layers (free items; w line width, h text height)
Mechanical1:
  the board outline again, w20

## Text inside footprints (layer, text, board x,y; h text height)
Cd_tft: TopOverlay "+" at 2283.35,2196.85 h45 r270
Cin: TopOverlay "+" at 1309.45,2581.65 h45 r180
Cout1: TopOverlay "+" at 1016.18,1858.35 h45
Cout4: TopOverlay "+" at 1531.85,1906.65 h45 r180
Uc: TopOverlay "21" at 2250,1475 h35.43 r90; TopOverlay "40" at 270,1555 h35.43 r90; TopOverlay "20" at 2250,875 h35.43 r90; TopOverlay "1" at 273.62,814.45 h50 r90